# EAGLE board ColorLCD (EAGLE 6.5.0)
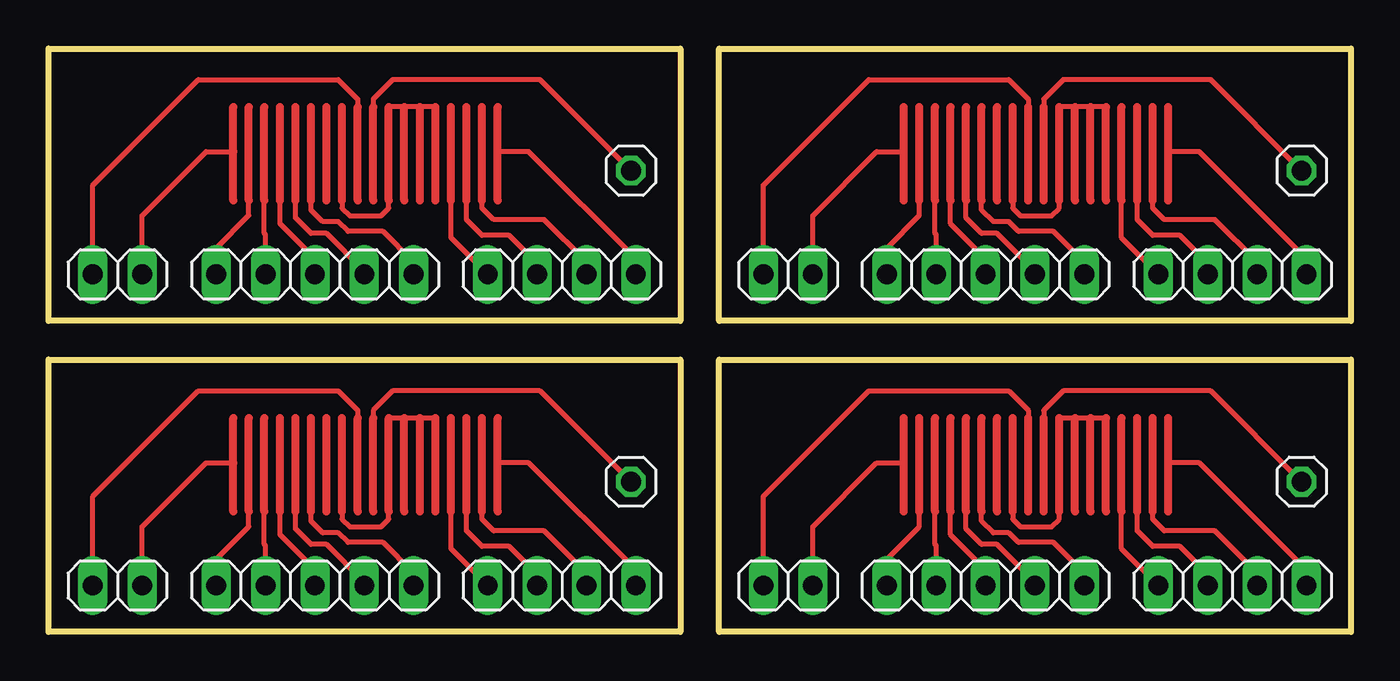
[diagram p0: board, top side]

Size 67 x 30 mm. Coordinates in mm from the lower left corner, seen from the top.
Outline: 0,16 0,30 32.5,30 32.5,16 0,16
Outline: 0,0 0,14 32.5,14 32.5,0 0,0
Outline: 34.5,16 34.5,30 67,30 67,16 34.5,16
Outline: 34.5,0 34.5,14 67,14 67,0 34.5,0
Copper layers (1*16): Top 0.035mm / dielectric 1.5mm / Bottom 0.035mm
Design rules "default": minimum track width 10mil, minimum drill 24mil, track to track 8mil, track to pad 8mil, pad to pad 8mil, via to via 8mil, smd to smd 8mil, copper to edge 40mil, drill to drill 8mil, minimum pad ring 10mil, minimum via ring 8mil, stop-mask expansion 4mil, vias tented up to drill 0mil, thermal gap 10mil

## Footprints (pad centres in the part's own frame; a part is rotated, then mirrored left to right if it is on the bottom)
1X04 = drill 1.016 long: 1 -3.81,0; 2 -1.27,0; 3 1.27,0; 4 3.81,0
1X05 = drill 1.016 long: 1 -5.08,0; 2 -2.54,0; 3 0,0; 4 2.54,0; 5 5.08,0
1X02 = drill 1.016 long: 1 -1.27,0; 2 1.27,0
1X01 = drill 1.016 octagon: 1 0,0

## Placement (x,y rotation side)
E$1  [1X04]  26.4,18.39 0 top
E$2  [1X05]  13.7,18.39 0 top
E$3  [1X02]  3.54,18.39 0 top
E$4  [1X04]  26.4,2.39 0 top
E$5  [1X01]  29.96,23.72 0 top
E$6  [1X05]  13.7,2.39 0 top
E$7  [1X02]  3.54,2.39 0 top
E$8  [1X01]  29.96,7.72 0 top
E$9  [1X04]  60.9,18.39 0 top
E$10  [1X05]  48.2,18.39 0 top
E$11  [1X02]  38.04,18.39 0 top
E$12  [1X01]  64.46,23.72 0 top
E$13  [1X04]  60.9,2.39 0 top
E$14  [1X05]  48.2,2.39 0 top
E$15  [1X02]  38.04,2.39 0 top
E$16  [1X01]  64.46,7.72 0 top

## Library data of the parts
E$1-E$16 = pinhead

## Nets
S$1: E$1.2
S$2: E$1.3
S$3: E$3.1
S$4: E$5.1
S$7: E$1.1
S$11: E$4.1
S$12: E$1.4
S$18: E$7.1
S$19: E$3.2
S$20: E$2.1
S$21: E$2.2
S$22: E$2.3
S$23: E$2.4
S$24: E$2.5
S$25: E$7.2
S$26: E$6.1
S$27: E$6.2
S$28: E$6.3
S$29: E$6.4
S$30: E$6.5
S$31: E$4.2
S$32: E$4.3
S$33: E$4.4
S$34: E$8.1
S$37: E$9.1
S$41: E$11.1
S$42: E$11.2
S$43: E$10.1
S$44: E$10.2
S$45: E$10.3
S$46: E$10.4
S$47: E$10.5
S$48: E$9.2
S$49: E$9.3
S$50: E$9.4
S$51: E$12.1
S$54: E$13.1
S$58: E$15.1
S$59: E$15.2
S$60: E$14.1
S$61: E$14.2
S$62: E$14.3
S$63: E$14.4
S$64: E$14.5
S$65: E$13.2
S$66: E$13.3
S$67: E$13.4
S$68: E$16.1

## Tracks (layer width: path | path; a pad name or v marks a point on that pad's centre or on a via)
S$1
  Top 0.254: E$1.2 25.13,18.97 23.7,20.4 22.3,20.4 21.5,21.2 21.5,22.2
  Top 0.406: 21.5,22.2 21.5,27
S$2
  Top 0.254: E$1.3 27.67,19.03 25.5,21.2 22.9,21.2 22.3,21.8 22.3,22.2
  Top 0.406: 22.3,22.2 22.3,27
S$3
  Top 0.254: E$3.1 2.27,22.97 7.7,28.4 14.9,28.4 15.9,27.4 15.9,27
  Top 0.406: 15.9,22.2 15.9,27
S$4
  Top 0.254: E$5.1 25.28,28.4 17.7,28.4 16.7,27.4 16.7,27
  Top 0.406: 16.7,22.2 16.7,27
S$5
  Top 0.254: 15.1,6.2 15.1,5.8 15.5,5.4 17.1,5.4 17.5,5.8 17.5,6.2
  Top 0.406: 15.1,6.2 15.1,11
S$6
  Top 0.406: 14.3,6.2 14.3,11
S$7
  Top 0.254: E$1.1 20.7,20.28 20.7,22.2
  Top 0.406: 20.7,22.2 20.7,27
S$8
  Top 0.254: 19.9,27 17.5,27
  Top 0.406: 19.9,22.2 19.9,27 | 17.5,22.2 17.5,27
S$9
  Top 0.406: 19.1,22.2 19.1,27
S$10
  Top 0.406: 18.3,22.2 18.3,27
S$11
  Top 0.254: E$4.1 20.7,4.28 20.7,6.2
  Top 0.406: 20.7,6.2 20.7,11
S$12
  Top 0.254: E$1.4 30.21,19.19 24.7,24.7 23.1,24.7
  Top 0.406: 23.1,22.2 23.1,24.7 23.1,27
S$13
  Top 0.254: 15.1,22.2 15.1,21.8 15.5,21.4 17.1,21.4 17.5,21.8 17.5,22.2
  Top 0.406: 15.1,22.2 15.1,27
S$14
  Top 0.406: 14.3,22.2 14.3,27
S$15
  Top 0.254: 19.9,11 17.5,11
  Top 0.406: 19.9,6.2 19.9,11 | 17.5,6.2 17.5,11
S$16
  Top 0.406: 19.1,6.2 19.1,11
S$17
  Top 0.406: 18.3,6.2 18.3,11
S$18
  Top 0.254: E$7.1 2.27,6.97 7.7,12.4 14.9,12.4 15.9,11.4 15.9,11
  Top 0.406: 15.9,6.2 15.9,11
S$19
  Top 0.254: E$3.2 4.81,21.41 8.1,24.7 9.5,24.7
  Top 0.406: 9.5,22.2 9.5,24.7 9.5,27
S$20
  Top 0.254: E$2.1 8.62,19.74 10.3,21.42 10.3,22.2
  Top 0.406: 10.3,22.2 10.3,27
S$21
  Top 0.254: E$2.2 11.16,20.44 11.1,20.5 11.1,22.2
  Top 0.406: 11.1,22.2 11.1,27
S$22
  Top 0.254: E$2.3 13.7,19.2 11.9,21 11.9,22.2
  Top 0.406: 11.9,22.2 11.9,27
S$23
  Top 0.254: E$2.4 16.24,18.56 14.3,20.5 13.5,20.5 12.7,21.3 12.7,22.2
  Top 0.406: 12.7,22.2 12.7,27
S$24
  Top 0.254: E$2.5 18.78,19.02 17.2,20.6 15.4,20.6 14.9,21.1 14.1,21.1 13.5,21.7 13.5,22.2
  Top 0.406: 13.5,22.2 13.5,27
S$25
  Top 0.254: E$7.2 4.81,5.41 8.1,8.7 9.5,8.7
  Top 0.406: 9.5,6.2 9.5,8.7 9.5,11
S$26
  Top 0.254: E$6.1 8.62,3.74 10.3,5.42 10.3,6.2
  Top 0.406: 10.3,6.2 10.3,11
S$27
  Top 0.254: E$6.2 11.16,4.44 11.1,4.5 11.1,6.2
  Top 0.406: 11.1,6.2 11.1,11
S$28
  Top 0.254: E$6.3 13.7,3.2 11.9,5 11.9,6.2
  Top 0.406: 11.9,6.2 11.9,11
S$29
  Top 0.254: E$6.4 16.24,2.56 14.3,4.5 13.5,4.5 12.7,5.3 12.7,6.2
  Top 0.406: 12.7,6.2 12.7,11
S$30
  Top 0.254: E$6.5 18.78,3.02 17.2,4.6 15.4,4.6 14.9,5.1 14.1,5.1 13.5,5.7 13.5,6.2
  Top 0.406: 13.5,6.2 13.5,11
S$31
  Top 0.254: E$4.2 25.13,2.97 23.7,4.4 22.3,4.4 21.5,5.2 21.5,6.2
  Top 0.406: 21.5,6.2 21.5,11
S$32
  Top 0.254: E$4.3 27.67,3.03 25.5,5.2 22.9,5.2 22.3,5.8 22.3,6.2
  Top 0.406: 22.3,6.2 22.3,11
S$33
  Top 0.254: E$4.4 30.21,3.19 24.7,8.7 23.1,8.7
  Top 0.406: 23.1,6.2 23.1,8.7 23.1,11
S$34
  Top 0.254: E$8.1 25.28,12.4 17.7,12.4 16.7,11.4 16.7,11
  Top 0.406: 16.7,6.2 16.7,11
S$35
  Top 0.254: 49.6,22.2 49.6,21.8 50,21.4 51.6,21.4 52,21.8 52,22.2
  Top 0.406: 49.6,22.2 49.6,27
S$36
  Top 0.406: 48.8,22.2 48.8,27
S$37
  Top 0.254: E$9.1 55.2,20.28 55.2,22.2
  Top 0.406: 55.2,22.2 55.2,27
S$38
  Top 0.254: 54.4,27 52,27
  Top 0.406: 54.4,22.2 54.4,27 | 52,22.2 52,27
S$39
  Top 0.406: 53.6,22.2 53.6,27
S$40
  Top 0.406: 52.8,22.2 52.8,27
S$41
  Top 0.254: E$11.1 36.77,22.97 42.2,28.4 49.4,28.4 50.4,27.4 50.4,27
  Top 0.406: 50.4,22.2 50.4,27
S$42
  Top 0.254: E$11.2 39.31,21.41 42.6,24.7 44,24.7
  Top 0.406: 44,22.2 44,24.7 44,27
S$43
  Top 0.254: E$10.1 43.12,19.74 44.8,21.42 44.8,22.2
  Top 0.406: 44.8,22.2 44.8,27
S$44
  Top 0.254: E$10.2 45.66,20.44 45.6,20.5 45.6,22.2
  Top 0.406: 45.6,22.2 45.6,27
S$45
  Top 0.254: E$10.3 48.2,19.2 46.4,21 46.4,22.2
  Top 0.406: 46.4,22.2 46.4,27
S$46
  Top 0.254: E$10.4 50.74,18.56 48.8,20.5 48,20.5 47.2,21.3 47.2,22.2
  Top 0.406: 47.2,22.2 47.2,27
S$47
  Top 0.254: E$10.5 53.28,19.02 51.7,20.6 49.9,20.6 49.4,21.1 48.6,21.1 48,21.7 48,22.2
  Top 0.406: 48,22.2 48,27
S$48
  Top 0.254: E$9.2 59.63,18.97 58.2,20.4 56.8,20.4 56,21.2 56,22.2
  Top 0.406: 56,22.2 56,27
S$49
  Top 0.254: E$9.3 62.17,19.03 60,21.2 57.4,21.2 56.8,21.8 56.8,22.2
  Top 0.406: 56.8,22.2 56.8,27
S$50
  Top 0.254: E$9.4 64.71,19.19 59.2,24.7 57.6,24.7
  Top 0.406: 57.6,22.2 57.6,24.7 57.6,27
S$51
  Top 0.254: E$12.1 59.78,28.4 52.2,28.4 51.2,27.4 51.2,27
  Top 0.406: 51.2,22.2 51.2,27
S$52
  Top 0.254: 49.6,6.2 49.6,5.8 50,5.4 51.6,5.4 52,5.8 52,6.2
  Top 0.406: 49.6,6.2 49.6,11
S$53
  Top 0.406: 48.8,6.2 48.8,11
S$54
  Top 0.254: E$13.1 55.2,4.28 55.2,6.2
  Top 0.406: 55.2,6.2 55.2,11
S$55
  Top 0.254: 54.4,11 52,11
  Top 0.406: 54.4,6.2 54.4,11 | 52,6.2 52,11
S$56
  Top 0.406: 53.6,6.2 53.6,11
S$57
  Top 0.406: 52.8,6.2 52.8,11
S$58
  Top 0.254: E$15.1 36.77,6.97 42.2,12.4 49.4,12.4 50.4,11.4 50.4,11
  Top 0.406: 50.4,6.2 50.4,11
S$59
  Top 0.254: E$15.2 39.31,5.41 42.6,8.7 44,8.7
  Top 0.406: 44,6.2 44,8.7 44,11
S$60
  Top 0.254: E$14.1 43.12,3.74 44.8,5.42 44.8,6.2
  Top 0.406: 44.8,6.2 44.8,11
S$61
  Top 0.254: E$14.2 45.66,4.44 45.6,4.5 45.6,6.2
  Top 0.406: 45.6,6.2 45.6,11
S$62
  Top 0.254: E$14.3 48.2,3.2 46.4,5 46.4,6.2
  Top 0.406: 46.4,6.2 46.4,11
S$63
  Top 0.254: E$14.4 50.74,2.56 48.8,4.5 48,4.5 47.2,5.3 47.2,6.2
  Top 0.406: 47.2,6.2 47.2,11
S$64
  Top 0.254: E$14.5 53.28,3.02 51.7,4.6 49.9,4.6 49.4,5.1 48.6,5.1 48,5.7 48,6.2
  Top 0.406: 48,6.2 48,11
S$65
  Top 0.254: E$13.2 59.63,2.97 58.2,4.4 56.8,4.4 56,5.2 56,6.2
  Top 0.406: 56,6.2 56,11
S$66
  Top 0.254: E$13.3 62.17,3.03 60,5.2 57.4,5.2 56.8,5.8 56.8,6.2
  Top 0.406: 56.8,6.2 56.8,11
S$67
  Top 0.254: E$13.4 64.71,3.19 59.2,8.7 57.6,8.7
  Top 0.406: 57.6,6.2 57.6,8.7 57.6,11
S$68
  Top 0.254: E$16.1 59.78,12.4 52.2,12.4 51.2,11.4 51.2,11
  Top 0.406: 51.2,6.2 51.2,11

## Text on the board
Reference: LCD | GND | RST | SCK | D/C | CS | SDI | SDO | GND | VCC | LedA | LedC1 | LedC2 | LedC3 | LedC4 | XL | YU | XR | YD